# Altium PCB Alsoran PCB-20180114-version2.PcbDoc (part 1 of 4)
Units mil, origin at the board's own origin, x right, y up, seen from the top; angles counter-clockwise.
Board outline 15223.67 x 4104.31 mil, 2 copper layers (Top Layer, Bottom Layer); 293 components, 222 nets, 1561 pads, 240 vias.
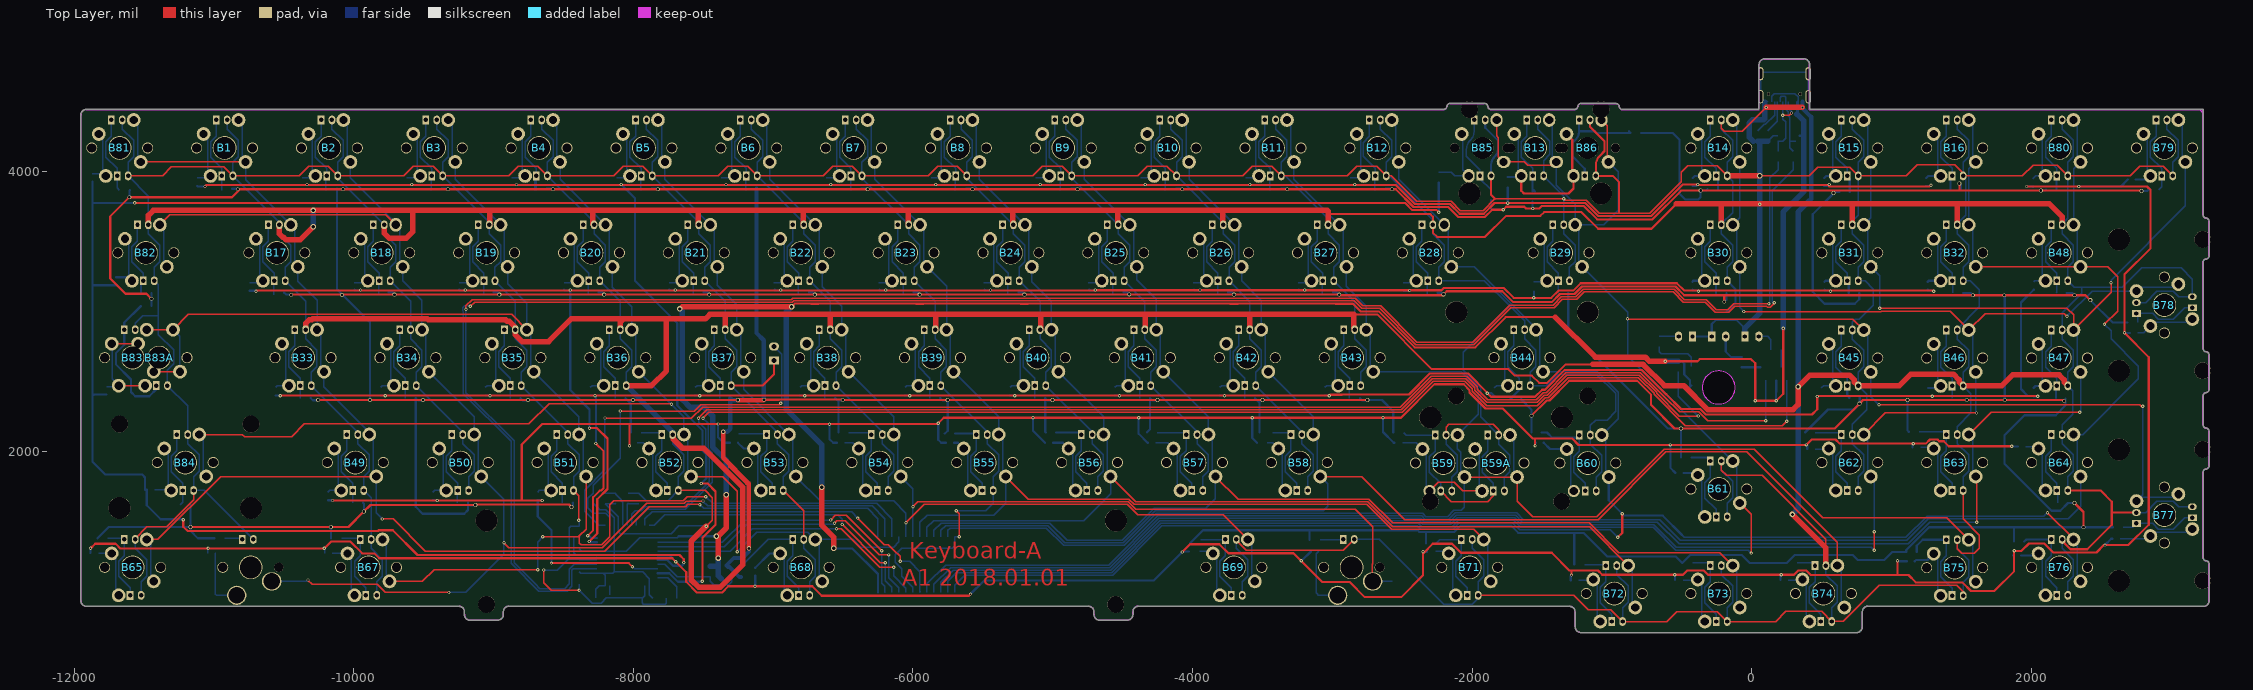
[diagram p0: Top Layer view]
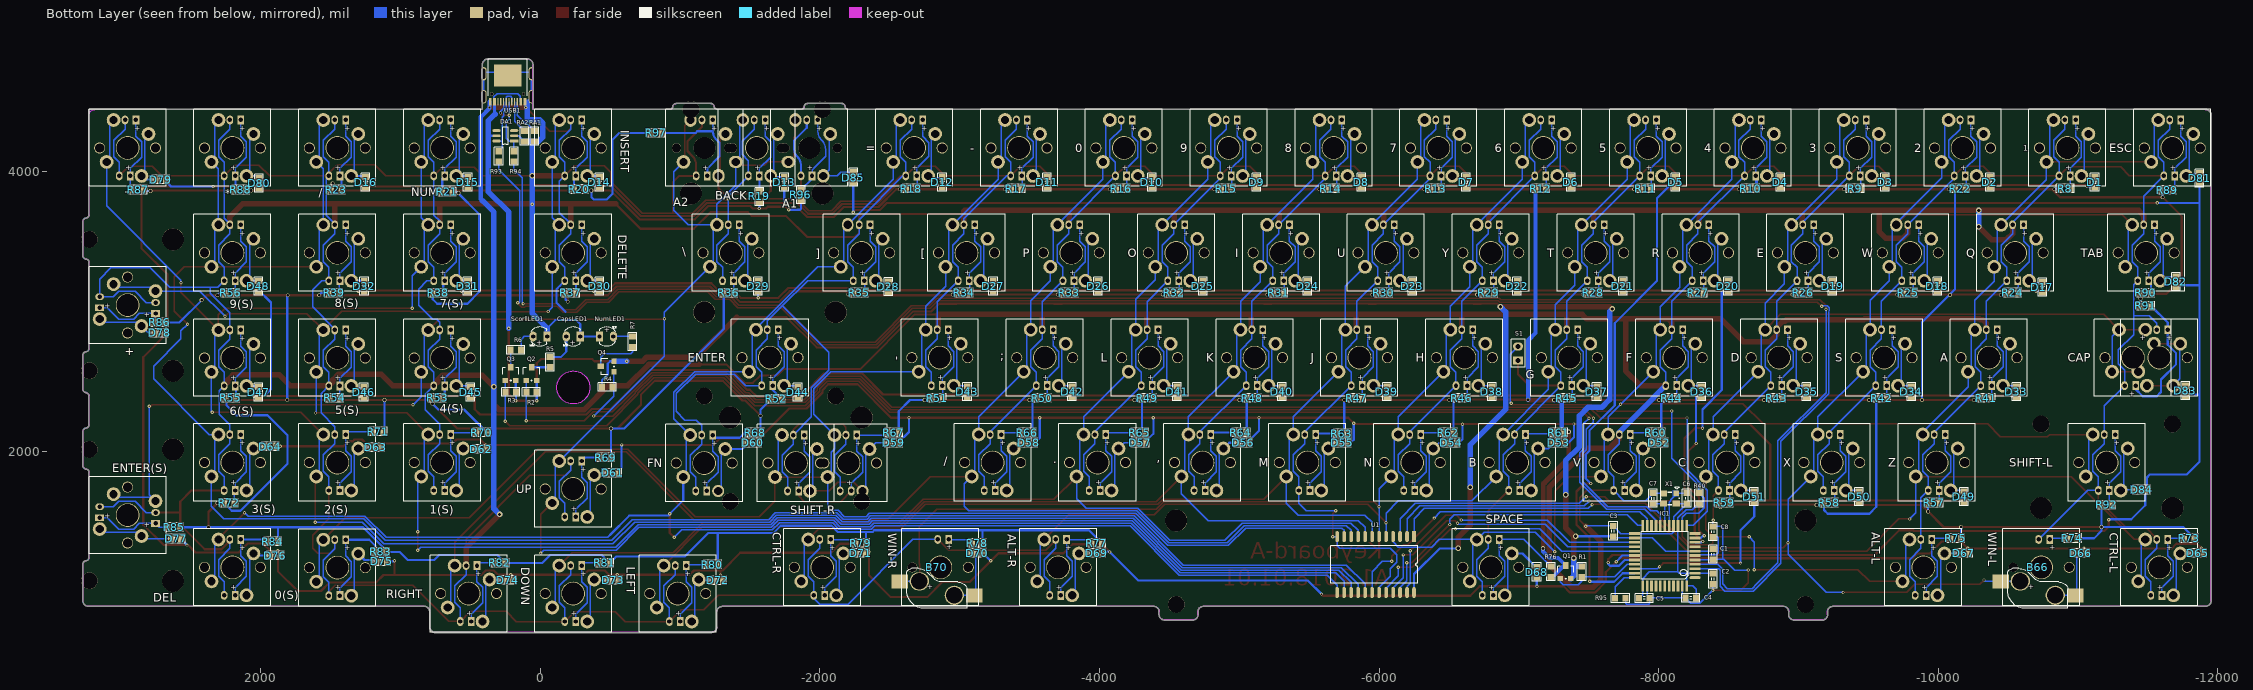
[diagram p1: Bottom Layer view, seen from below]

## Layer stack, top to bottom
Top Solder: solder mask 0.4, Solder Resist, Dk 3.5
Top Layer: signal copper 1.4
Dielectric1: dielectric 12.6, FR-4, Dk 4.8
Bottom Layer: signal copper 1.4
Bottom Solder: solder mask 0.4, Solder Resist, Dk 3.5

## Board outline
-9167.83,791.11 cw(c-9167.47,832.47) -9208.82,832.86 cw(c-9206.83,832.84) -9208.68,833.58 -9208.68,853.11 cw(c-9246.06,852.74) -9208.67,852.74 cw(c-9246.06,852.74) -9208.68,852.38 ccw(c-9206.69,852.36) -9208.68,852.36 -9208.68,853.11 ccw(c-9246.06,852.74) -9245.73,890.13 cw(c-9245.72,892.11) -9246.83,890.47 -11915.09,890.47 cw(c-11915.09,892.46) -11916.44,891 cw(c-11910.65,931.94) -11951.59,926.18 cw(c-11950.01,927.38) -11952,927.38 -11952,4407.27 cw(c-11950.01,4407.27) -11951.68,4408.35 -11951.67,4408.35 cw(c-11910.53,4404.25) -11914.52,4445.41 cw(c-11913.67,4443.62) -11913.67,4445.6 -2203.98,4445.6 cw(c-2203.98,4443.62) -2203.82,4445.59 cw(c-2203.58,4443.62) -2203.6,4445.61 ccw(c-2203.79,4467.29) -2182.1,4467.29 ccw(c-2203.79,4467.29) -2182.1,4467.5 cw(c-2180.12,4467.52) -2181.33,4469.09 cw(c-2156.45,4462.83) -2156.68,4488.48 cw(c-2156.66,4486.49) -2155.65,4488.2 -1914.05,4488.2 cw(c-1913.06,4486.49) -1913.04,4488.47 cw(c-1913.27,4462.82) -1888.39,4469.09 cw(c-1889.6,4467.51) -1887.62,4467.51 cw(c-1889.6,4467.51) -1887.62,4467.49 ccw(c-1865.93,4467.28) -1866.13,4445.6 -1266.74,4445.6 ccw(c-1266.94,4467.28) -1245.25,4467.28 ccw(c-1266.94,4467.28) -1245.26,4467.49 cw(c-1243.27,4467.51) -1244.48,4469.09 cw(c-1219.6,4462.82) -1219.83,4488.47 cw(c-1219.81,4486.49) -1218.82,4488.2 -972.59,4488.2 cw(c-972.59,4486.22) -970.81,4487.1 cw(c-972.8,4461.53) -947.92,4467.79 cw(c-949.13,4466.22) -947.15,4466.22 cw(c-949.13,4466.22) -947.15,4466.2 ccw(c-925.46,4465.99) -925.66,4444.31 51.17,4444.31 51.17,4768.7 cw(c53.15,4768.7) 51.66,4770.01 cw(c92.8,4765.84) 89,4807.02 cw(c89.57,4805.12) 89.57,4807.1 90.03,4807.1 cw(c92.8,4765.84) 93.2,4807.19 cw(c93.18,4805.21) 93.77,4807.1 372.05,4807.1 cw(c372.05,4805.12) 373.08,4806.81 cw(c372.14,4765.47) 413.49,4765.47 cw(c372.14,4765.47) 413.49,4765.07 cw(c411.51,4765.09) 413.4,4764.5 413.4,4445.6 3226.15,4445.6 cw(c3226.15,4443.62) 3228.13,4443.62 3228.13,3689.8 cw(c3226.15,3689.8) 3228.13,3689.65 ccw(c3249.81,3690.01) 3250.02,3668.32 cw(c3250.04,3666.34) 3251.61,3667.55 cw(c3245.35,3642.67) 3270.94,3644.42 cw(c3269.69,3642.88) 3271.67,3642.88 3271.67,3395.67 cw(c3269.69,3395.67) 3270.37,3393.81 cw(c3245.35,3399.49) 3251.62,3374.61 cw(c3250.05,3375.82) 3250.03,3373.84 ccw(c3249.82,3352.15) 3228.13,3352.35 3228.13,2734.25 cw(c3226.15,2734.25) 3228.13,2734.1 ccw(c3249.81,2734.46) 3250.02,2712.78 cw(c3250.04,2710.79) 3251.61,2712 cw(c3245.35,2687.12) 3270.94,2688.87 cw(c3269.69,2687.33) 3271.67,2687.33 3271.67,2440.12 cw(c3269.69,2440.12) 3270.37,2438.26 cw(c3245.35,2443.94) 3251.62,2419.07 cw(c3250.05,2420.28) 3250.03,2418.29 ccw(c3249.82,2396.61) 3228.13,2396.81 3228.13,2187.99 cw(c3226.15,2187.99) 3228.13,2187.84 ccw(c3249.81,2188.2) 3250.02,2166.52 cw(c3250.04,2164.53) 3251.61,2165.74 cw(c3245.35,2140.86) 3270.94,2142.61 cw(c3269.69,2141.07) 3271.67,2141.07 3271.67,1893.86 cw(c3269.69,1893.86) 3270.37,1892 cw(c3245.35,1897.68) 3251.62,1872.81 cw(c3250.05,1874.02) 3250.03,1872.03 ccw(c3249.82,1850.35) 3228.13,1850.55 3228.13,1238.77 ccw(c3249.81,1239.38) 3250.02,1217.7 cw(c3250.04,1215.71) 3251.61,1216.92 cw(c3245.35,1192.04) 3270.94,1193.79 cw(c3269.69,1192.25) 3271.67,1192.25 3271.67,931.1 cw(c3269.69,931.1) 3271.67,931.05 ccw(c3230.32,931.45) 3271.67,931.08 3271.67,931.05 cw(c3230.32,931.45) 3229.92,890.1 cw(c3229.94,892.08) 3228.78,890.47 827.49,890.47 cw(c827.49,892.46) 826.98,890.54 ccw(c828.32,853.18) 790.93,853.51 cw(c788.95,853.52) 790.65,852.51 790.65,742.41 cw(c788.67,742.41) 790.26,741.23 cw(c749.02,744.23) 748.62,702.88 cw(c748.64,704.86) 748.05,702.97 -1222.67,702.97 cw(c-1222.67,704.96) -1223.69,703.25 cw(c-1223.24,744.61) -1264.59,745 cw(c-1262.6,744.99) -1264.5,745.58 -1264.5,851.1 cw(c-1262.51,851.1) -1264.42,851.66 cw(c-1262.8,852.8) -1264.78,852.78 ccw(c-1302.16,852.45) -1302.52,889.84 cw(c-1302.54,891.82) -1302.56,889.84 cw(c-1303.15,891.73) -1303.15,889.75 -4389.76,889.75 cw(c-4389.76,891.73) -4391.22,890.39 ccw(c-4388.69,853.09) -4426.08,853.45 -4426.08,833.93 cw(c-4427.92,833.19) -4425.94,833.21 cw(c-4467.29,832.81) -4425.94,832.81 cw(c-4467.29,832.81) -4466.19,791.47 cw(c-4466.94,793.31) -4466.94,791.32 -4664.23,791.32 cw(c-4665.12,793.1) -4665.14,791.11 cw(c-4664.77,832.47) -4706.13,832.86 cw(c-4704.14,832.84) -4705.98,833.58 -4705.98,853.11 cw(c-4743.37,852.74) -4705.98,852.74 cw(c-4743.37,852.74) -4705.98,852.38 ccw(c-4704,852.36) -4705.98,852.36 -4705.98,853.11 ccw(c-4743.37,852.74) -4743.04,890.13 cw(c-4743.02,892.11) -4744.14,890.47 -8891.72,890.47 ccw(c-8891.39,853.09) -8928.77,853.45 ccw(c-8891.39,853.09) -8928.77,852.73 cw(c-8930.75,852.71) -8928.77,852.71 -8928.77,833.93 cw(c-8930.61,833.19) -8928.63,833.21 cw(c-8969.98,832.81) -8928.63,832.81 cw(c-8969.98,832.81) -8968.89,791.47 cw(c-8969.64,793.31) -8969.64,791.32 -9166.92,791.32 cw(c-9167.81,793.1)
cut-out: -355.03,2456.18 ccw(c-236.92,2456.18) -236.92,2338.07 ccw(c-236.92,2456.18) -118.81,2456.18 ccw(c-236.92,2456.18) -236.92,2574.29 ccw(c-236.92,2456.18)

## Design rules (kind name [scope] priority, off if disabled: settings)
Clearance Clearance_3 [OnLayer('Keep-Out Layer')] p1: gap=0.39
Clearance Clearance_2 [All vs (InNet('LROW'))  && INPOLY] p2: gap=13.78
Clearance Clearance_1 [All vs OnLayer('Keep-Out Layer')] p3: gap=3.94
Clearance [All] p4: gap=6
PolygonConnect PolygonConnect_1 [All vs ISVIA] p1: connectstyle=Direct reliefconductorwidth=10 reliefentries=4 polygonreliefangle="90 Angle" airgapwidth=10
PolygonConnect [All] p2: connectstyle=Direct reliefconductorwidth=10 reliefentries=4 polygonreliefangle="90 Angle" airgapwidth=10
RoutingVias [All] p1: holewidth=23.62 width=39.37 viastyle="Through Hole" minholewidth=11.81 minwidth=23.62 maxholewidth=28 maxwidth=50
SilkToSolderMaskClearance SilkscreenOverComponentPads [IsPad] p1: minsilkscreentomaskgap=10 clearancetoexposedcopper=TRUE
SolderMaskExpansion [All] p1: expansion=4
Width [All] p1: maxlimit=39.37 minlimit=10 preferedwidth=15.75
29 further rules are at their usual default settings.

## Components (designator, comment, footprint, x,y, rotation, side; value= is the part's Value field where it differs from the comment)
B1 "1" BUT#1 -10923.39,4169.29 r180 top locked
B2 "2" BUT#1 -10173.56,4169.29 r180 top locked
B3 "3" BUT#1 -9423.72,4169.29 r180 top locked
B4 "4" BUT#1 -8673.89,4169.29 r180 top locked
B5 "5" BUT#1 -7924.05,4169.29 r180 top locked
B6 "6" BUT#1 -7174.21,4169.29 r180 top locked
B7 "7" BUT#1 -6424.38,4169.29 r180 top locked
B8 "8" BUT#1 -5674.54,4169.29 r180 top locked
B9 "9" BUT#1 -4924.71,4169.29 r180 top locked
B10 "0" BUT#1 -4174.87,4169.29 r180 top locked
B11 "-" BUT#1 -3425.03,4169.29 r180 top locked
B12 "=" BUT#1 -2675.2,4169.29 r180 top
B13 "BACK" BUT#2 -1549.21,4169.29 r180 top locked
B14 "INSERT" BUT#1 -236.22,4169.29 r180 top locked
B15 "NUM" BUT#1 700.79,4169.29 r180 top locked
B16 "/" BUT#1 1450.79,4169.29 r180 top locked
B17 "Q" BUT#1 -10549.21,3419.29 r180 top locked
B18 "W" BUT#3 -9799.23,3419.29 r180 top locked
B19 "E" BUT#1 -9049.25,3419.29 r180 top locked
B20 "R" BUT#1 -8299.26,3419.29 r180 top locked
B21 "T" BUT#1 -7549.28,3419.29 r180 top locked
B22 "Y" BUT#1 -6799.29,3419.29 r180 top locked
B23 "U" BUT#1 -6049.31,3419.29 r180 top locked
B24 "I" BUT#1 -5299.33,3419.29 r180 top locked
B25 "O" BUT#1 -4549.34,3419.29 r180 top locked
B26 "P" BUT#1 -3799.36,3419.29 r180 top locked
B27 "[" BUT#1 -3049.38,3419.29 r180 top locked
B28 "]" BUT#4 -2299.39,3419.29 r180 top locked
B29 "\" BUT#1 -1364.17,3419.29 r180 top locked
B30 "DELETE" BUT#1 -236.22,3419.29 r180 top locked
B31 "7(S)" BUT#1 700.79,3419.29 r180 top locked
B32 "8(S)" BUT#1 1450.79,3419.29 r180 top locked
B33 "A" BUT#1 -10362.2,2669.29 r180 top locked
B34 "S" BUT#1 -9611.81,2669.29 r180 top locked
B35 "D" BUT#1 -8861.42,2669.29 r180 top locked
B36 "F" BUT#1 -8111.02,2669.29 r180 top locked
B37 "G" BUT#1 -7360.63,2669.29 r180 top locked
B38 "H" BUT#1 -6610.24,2669.29 r180 top locked
B39 "J" BUT#1 -5859.84,2669.29 r180 top locked
B40 "K" BUT#1 -5109.45,2669.29 r180 top locked
B41 "L" BUT#1 -4359.06,2669.29 r180 top locked
B42 ";" BUT#1 -3608.66,2669.29 r180 top locked
B43 "'" BUT#1 -2858.27,2669.29 r180 top locked
B44 "ENTER" BUT#1 -1643.7,2669.29 r180 top locked
B45 "4(S)" BUT#1 700.79,2667.32 r180 top locked
B46 "5(S)" BUT#1 1450.79,2667.32 r180 top locked
B47 "6(S)" BUT#1 2200.79,2667.32 r180 top locked
B48 "9(S)" BUT#1 2200.79,3419.29 r180 top locked
B49 "Z" BUT#1 -9988.19,1919.29 r180 top locked
B50 "X" BUT#1 -9237.97,1919.29 r180 top locked
B51 "C" BUT#1 -8487.75,1919.29 r180 top locked
B52 "V" BUT#1 -7737.53,1919.29 r180 top locked
B53 "B" BUT#1 -6987.31,1919.29 r180 top locked
B54 "N" BUT#1 -6237.1,1919.29 r180 top locked
B55 "M" BUT#1 -5486.88,1919.29 r180 top locked
B56 "," BUT#1 -4736.66,1919.29 r180 top locked
B57 "." BUT#1 -3986.44,1919.29 r180 top locked
B58 "/" BUT#1 -3236.22,1919.29 r180 top locked
B59 "SHIFT-R" BUT#5 -2205.41,1915.8 r180 top locked
B59A "SHIFT-R" BUT#1 -1829.32,1915.8 r180 top locked
B60 "FN" BUT#6 -1173.23,1915.8 r180 top locked
B61 "UP" BUT#1 -236.22,1730.31 r180 top locked
B62 "1(S)" BUT#1 700.79,1919.29 r180 top locked
B63 "2(S)" BUT#1 1450.79,1919.29 r180 top locked
B64 "3(S)" BUT#1 2200.79,1919.29 r180 top locked
B65 "CTRL-L" BUT#1 -11580.71,1169.29 r180 top locked
B66 "WIN-L" BUT1#1 -10736.22,1169.29 r0 top
B67 "ALT-L" BUT#1 -9893.7,1169.29 r180 top locked
B68 "SPACE" BUT#1 -6799.21,1169.29 r180 top
B69 "ALT-R" BUT#1 -3704.72,1169.29 r180 top locked
B70 "WIN-R" BUT1#2 -2862.2,1169.29 r0 top locked
B71 "CTRL-R" BUT#1 -2017.72,1169.29 r180 top locked
B72 "LEFT" BUT#1 -984.25,982.28 r180 top locked
B73 "DOWN" BUT#1 -236.22,982.28 r180 top locked
B74 "RIGHT" BUT#1 511.81,982.28 r180 top locked
B75 "0(S)" BUT#1 1450.79,1167.32 r180 top locked
B76 "DEL" BUT#1 2200.79,1169.29 r180 top locked
B77 "ENTER(S)" BUT#1 2950.79,1543.31 r270 top locked
B78 "+" BUT#1 2950.79,3045.28 r270 top locked
B79 "-" BUT#1 2950.79,4169.29 r180 top locked
B80 "*" BUT#1 2200.79,4169.29 r180 top locked
B81 "ESC" BUT#1 -11673.23,4169.29 r180 top locked
B82 "TAB" BUT#1 -11486.22,3419.29 r180 top locked
B83 "CAP" BUT#7 -11580.71,2669.29 r180 top locked
B83A "CAP" BUT#8 -11391.73,2669.29 r180 top locked
B84 "SHIFT-L" BUT#1 -11204.72,1919.29 r180 top locked
B85 "A1" BUT#9 -1925.36,4169.29 r180 top (schematic designator B13)
B86 "A2" BUT#10 -1175.53,4169.29 r180 top (schematic designator B13)
C1 "100nF(104) 10% 50V" c0805 -8387.8,1264.17 r90 bottom
C2 "100nF(104) 10% 50V" c0805 -8387.8,1086.61 r90 bottom
C3 "100nF(104) 10% 50V" c0805 -7675.2,1429.13 r270 bottom
C4 "100nF(104) 10% 50V" c0805 -8230.31,950.79 r180 bottom
C5 "1uF (105) 10% 50V" c0805 -7897.64,948.82 r0 bottom
C6 "22pF (220) 5% 50V" C0805 -8200.79,1663.41 r90 bottom
C7 "22pF (220) 5% 50V" C0805 -7960.63,1662.63 r270 bottom
C8 "1uF (105) 10% 50V" C0805 -8387.8,1425.2 r270 bottom
CapsLED1 "LED" LED -186.92,2820.87 r180 bottom
D1 "Snip-二极管" D0805 -11118.77,3954.72 r0 bottom
D2 "Snip-二极管" D0805 -10369.42,3954.72 r0 bottom
D3 "Snip-二极管" D0805 -9620.08,3954.72 r0 bottom
D4 "Snip-二极管" D0805 -8870.74,3954.72 r0 bottom
D5 "Snip-二极管" D0805 -8121.39,3954.72 r0 bottom
D6 "Snip-二极管" D0805 -7372.05,3954.72 r0 bottom
D7 "Snip-二极管" D0805 -6622.7,3954.72 r0 bottom
D8 "Snip-二极管" D0805 -5873.36,3954.72 r0 bottom
D9 "Snip-二极管" D0805 -5124.02,3954.72 r0 bottom
D10 "Snip-二极管" D0805 -4374.67,3954.72 r0 bottom
D11 "Snip-二极管" D0805 -3625.33,3954.72 r0 bottom
D12 "Snip-二极管" D0805 -2875.98,3954.72 r0 bottom
D13 "Snip-二极管" D0805 -1746.06,3954.72 r0 bottom
D14 "Snip-二极管" D0805 -423.23,3954.72 r0 bottom
D15 "Snip-二极管" D0805 517.72,3954.72 r0 bottom
D16 "Snip-二极管" D0805 1248.03,3954.72 r0 bottom
D17 "Snip-二极管" D0805 -10744.59,3204.72 r0 bottom
D18 "Snip-二极管" D0805 -9993.86,3212.22 r0 bottom
D19 "Snip-二极管" D0805 -9244.37,3212.22 r0 bottom
D20 "Snip-二极管" D0805 -8494.88,3212.22 r0 bottom
D21 "Snip-二极管" D0805 -7743.42,3212.22 r0 bottom
D22 "Snip-二极管" D0805 -6988.03,3212.22 r0 bottom
D23 "Snip-二极管" D0805 -6238.54,3212.22 r0 bottom
D24 "Snip-二极管" D0805 -5489.05,3212.22 r0 bottom
D25 "Snip-二极管" D0805 -4739.56,3212.22 r0 bottom
D26 "Snip-二极管" D0805 -3990.08,3212.22 r0 bottom
D27 "Snip-二极管" D0805 -3240.59,3212.22 r0 bottom
D28 "Snip-二极管" D0805 -2491.1,3208.28 r0 bottom
D29 "Snip-二极管" D0805 -1558.98,3212.22 r0 bottom
D30 "Snip-二极管" D0805 -425.47,3212.22 r0 bottom
D31 "Snip-二极管" D0805 519.69,3212.22 r0 bottom
D32 "Snip-二极管" D0805 1257.87,3212.22 r0 bottom
D33 "Snip-二极管" D0805 -10558.31,2456.69 r0 bottom
D34 "Snip-二极管" D0805 -9807.91,2456.69 r0 bottom
D35 "Snip-二极管" D0805 -9057.52,2456.69 r0 bottom
D36 "Snip-二极管" D0805 -8307.13,2456.69 r0 bottom
D37 "Snip-二极管" D0805 -7556.73,2456.69 r0 bottom
D38 "Snip-二极管" D0805 -6806.34,2456.69 r0 bottom
D39 "Snip-二极管" D0805 -6055.95,2456.69 r0 bottom
D40 "Snip-二极管" D0805 -5305.55,2456.69 r0 bottom
D41 "Snip-二极管" D0805 -4555.16,2456.69 r0 bottom
D42 "Snip-二极管" D0805 -3804.77,2456.69 r0 bottom
D43 "Snip-二极管" D0805 -3054.37,2456.69 r0 bottom
D44 "Snip-二极管" D0805 -1842.52,2452.76 r0 bottom
D45 "Snip-二极管" D0805 498.03,2452.76 r0 bottom
D46 "Snip-二极管" D0805 1261.81,2452.76 r0 bottom
D47 "Snip-二极管" D0805 2013.78,2452.76 r0 bottom
D48 "Snip-二极管" D0805 2015.75,3212.22 r0 bottom
D49 "Snip-二极管" D0805 -10183.31,1706.69 r0 bottom
D50 "Snip-二极管" D0805 -9433.11,1706.69 r0 bottom
D51 "Snip-二极管" D0805 -8682.91,1706.69 r0 bottom
D52 "Snip-二极管" D0805 -7972.44,2061.02 r270 bottom
D53 "Snip-二极管" D0805 -7251.97,2061.02 r270 bottom
D54 "Snip-二极管" D0805 -6486.22,2061.02 r270 bottom
D55 "Snip-二极管" D0805 -5706.69,2061.02 r270 bottom
D56 "Snip-二极管" D0805 -4998.03,2061.02 r270 bottom
D57 "Snip-二极管" D0805 -4262.03,2061.02 r270 bottom
D58 "Snip-二极管" D0805 -3464.57,2061.02 r270 bottom
D59 "Snip-二极管" D0805 -2498.03,2061.02 r270 bottom
D60 "Snip-二极管" D0805 -1488.19,2061.02 r270 bottom
D61 "Snip-二极管" D0805 -488.19,1844.49 r270 bottom
D62 "Snip-二极管" D0805 452.76,2015.75 r270 bottom
D63 "Snip-二极管" D0805 1206.69,2027.56 r270 bottom
D64 "Snip-二极管" D0805 1960.63,2033.46 r270 bottom
D65 "Snip-二极管" D0805 -11824.8,1271.65 r270 bottom
D66 "Snip-二极管" D0805 -10988.19,1271.65 r270 bottom
D67 "Snip-二极管" D0805 -10151.57,1271.65 r270 bottom
D68 "Snip-二极管" D0805 -7127.95,1167.3 r0 bottom
D69 "Snip-二极管" D0805 -3948.82,1271.65 r270 bottom
D70 "Snip-二极管" D0805 -3096.46,1271.65 r270 bottom
D71 "Snip-二极管" D0805 -2259.84,1271.65 r270 bottom
D72 "Snip-二极管" D0805 -1238.19,1076.77 r270 bottom
D73 "Snip-二极管" D0805 -492.13,1078.74 r270 bottom
D74 "Snip-二极管" D0805 261.81,1078.74 r270 bottom
D75 "Snip-二极管" D0805 1165.35,1212.6 r270 bottom
D76 "Snip-二极管" D0805 1925.2,1253.94 r270 bottom
D77 "Snip-二极管" D0805 2635.83,1374.02 r270 bottom
D78 "Snip-二极管" D0805 2753.94,2846.46 r270 bottom
D79 "Snip-二极管" D0805 2746.06,3942.91 r270 bottom
D80 "Snip-二极管" D0805 2009.84,3948.82 r0 bottom
D81 "Snip-二极管" D0805 -11868.11,3984.25 r0 bottom
D82 "Snip-二极管" D0805 -11698.82,3244.09 r0 bottom
D83 "Snip-二极管" D0805 -11767.72,2462.6 r0 bottom
D84 "Snip-二极管" D0805 -11423.23,1724.41 r270 bottom
D85 "Snip-二极管" D0805 -2240,3989.37 r0 bottom (schematic designator D12)
DA1 "TVS SRV05" SOT-23-6 186.02,4218.5 r0 bottom
IC1 "AtmEGA 32U4" LQFP44 -8259.84,1096.46 r0 bottom locked
NumLED1 "LED" LED -524.13,2820.87 r0 bottom
Q1 "CJ2305" sot-23 -7276.08,1068.61 r180 bottom
Q2 "CJ2305" sot-23 120.6,2486.6 r180 bottom
Q3 "CJ2305" sot-23 270,2486.6 r180 bottom
Q4 "CJ2305" sot-23 -547.24,2547.24 r90 bottom
R1 "10KΩ (1002) ±1%" 0805 -7449.95,1139.15 r90 bottom
R2 "10KΩ (1002) ±1%" 0805 61.81,2424.3 r180 bottom
R3 "10KΩ (1002) ±1%" 0805 211.2,2424.3 r180 bottom
R4 "10KΩ (1002) ±1%" 0805 -480.31,2460.63 r0 bottom
R5 "R for LED" 0805 -71.5,2638.08 r90 bottom
R6 "R for LED" 0805 173.6,2724.8 r180 bottom
R7 "R for LED" 0805 -661.1,2783.46 r90 bottom
R8 "Snip-灯阻" 0805 -10907.48,3877.95 r180 bottom
R9 "Snip-灯阻" 0805 -9407.12,3877.95 r180 bottom
R10 "Snip-灯阻" 0805 -8656.94,3877.95 r180 bottom
R11 "Snip-灯阻" 0805 -7906.76,3877.95 r180 bottom
R12 "Snip-灯阻" 0805 -7156.59,3877.95 r180 bottom
R13 "Snip-灯阻" 0805 -6406.41,3877.95 r180 bottom
R14 "Snip-灯阻" 0805 -5656.23,3877.95 r180 bottom
R15 "Snip-灯阻" 0805 -4906.05,3877.95 r180 bottom
R16 "Snip-灯阻" 0805 -4155.87,3877.95 r180 bottom
R17 "Snip-灯阻" 0805 -3405.69,3877.95 r180 bottom
R18 "Snip-灯阻" 0805 -2655.51,3877.95 r180 bottom
R19 "Snip-灯阻" 0805 -1568.15,3822 r90 bottom
R20 "Snip-灯阻" 0805 -279.53,3874.02 r0 bottom
R21 "Snip-灯阻" 0805 663.39,3854.33 r0 bottom
R22 "Snip-灯阻" 0805 -10157.3,3877.95 r180 bottom
R23 "Snip-灯阻" 0805 1458.66,3870.08 r180 bottom
R24 "Snip-灯阻" 0805 -10533.46,3133.86 r180 bottom
R25 "Snip-灯阻" 0805 -9783.46,3133.86 r180 bottom
R26 "Snip-灯阻" 0805 -9033.46,3133.86 r180 bottom
R27 "Snip-灯阻" 0805 -8283.46,3133.86 r180 bottom
R28 "Snip-灯阻" 0805 -7533.47,3133.86 r180 bottom
R29 "Snip-灯阻" 0805 -6783.47,3133.86 r180 bottom
R30 "Snip-灯阻" 0805 -6033.47,3133.86 r180 bottom
R31 "Snip-灯阻" 0805 -5283.47,3133.86 r180 bottom
R32 "Snip-灯阻" 0805 -4533.47,3133.86 r180 bottom
R33 "Snip-灯阻" 0805 -3783.47,3133.86 r180 bottom
R34 "Snip-灯阻" 0805 -3033.47,3133.86 r180 bottom
R35 "Snip-灯阻" 0805 -2283.47,3133.86 r180 bottom
R36 "Snip-灯阻" 0805 -1350.39,3131.89 r180 bottom
R37 "Snip-灯阻" 0805 -218.5,3131.89 r180 bottom
R38 "Snip-灯阻" 0805 730.31,3131.89 r180 bottom
R39 "Snip-灯阻" 0805 1474.41,3131.89 r180 bottom
R40 "10KΩ (1002) ±1%" 0805 -8287.4,1662.63 r270 bottom
R41 "Snip-灯阻" 0805 -10344.49,2379.92 r180 bottom
R42 "Snip-灯阻" 0805 -9594.09,2379.92 r180 bottom
R43 "Snip-灯阻" 0805 -8843.7,2379.92 r180 bottom
R44 "Snip-灯阻" 0805 -8093.31,2379.92 r180 bottom
R45 "Snip-灯阻" 0805 -7342.91,2379.92 r180 bottom
R46 "Snip-灯阻" 0805 -6592.52,2379.92 r180 bottom
R47 "Snip-灯阻" 0805 -5842.13,2379.92 r180 bottom
R48 "Snip-灯阻" 0805 -5091.73,2379.92 r180 bottom
R49 "Snip-灯阻" 0805 -4341.34,2379.92 r180 bottom
R50 "Snip-灯阻" 0805 -3590.94,2379.92 r180 bottom
R51 "Snip-灯阻" 0805 -2840.55,2379.92 r180 bottom
R52 "Snip-灯阻" 0805 -1688.98,2374.02 r180 bottom
R53 "Snip-灯阻" 0805 734.25,2381.89 r180 bottom
R54 "Snip-灯阻" 0805 1468.5,2381.89 r180 bottom
R55 "Snip-灯阻" 0805 2212.6,2381.89 r180 bottom
R56 "Snip-灯阻" 0805 2214.57,3131.89 r180 bottom
R57 "Snip-灯阻" 0805 -9970.47,1631.89 r180 bottom
R58 "Snip-灯阻" 0805 -9220.08,1631.89 r180 bottom
R59 "Snip-灯阻" 0805 -8469.69,1631.89 r180 bottom
R60 "Snip-灯阻" 0805 -7980.31,2133.86 r0 bottom
R61 "Snip-灯阻" 0805 -7283.46,2133.86 r0 bottom
R62 "Snip-灯阻" 0805 -6496.06,2133.86 r0 bottom
R63 "Snip-灯阻" 0805 -5734.84,2125.98 r0 bottom
R64 "Snip-灯阻" 0805 -5012.25,2133.86 r0 bottom
R65 "Snip-灯阻" 0805 -4289.37,2133.86 r0 bottom
R66 "Snip-灯阻" 0805 -3484.25,2133.86 r0 bottom
R67 "Snip-灯阻" 0805 -2527.56,2133.86 r0 bottom
R68 "Snip-灯阻" 0805 -1539.37,2133.86 r0 bottom
R69 "Snip-灯阻" 0805 -468.5,1954.72 r0 bottom
R70 "Snip-灯阻" 0805 417.32,2133.86 r0 bottom
R71 "Snip-灯阻" 0805 1159.45,2139.76 r0 bottom
R72 "Snip-灯阻" 0805 2224.41,1629.92 r180 bottom
R73 "Snip-灯阻" 0805 -11795.28,1377.95 r0 bottom
R74 "Snip-灯阻" 0805 -10959.65,1377.95 r0 bottom
R75 "Snip-灯阻" 0805 -10124.02,1377.95 r0 bottom
R76 "Snip-灯阻" 0805 -7228.59,1139.15 r90 bottom
R77 "Snip-灯阻" 0805 -3980.31,1342.52 r0 bottom
R78 "Snip-灯阻" 0805 -3125.98,1342.52 r0 bottom
R79 "Snip-灯阻" 0805 -2293.31,1342.52 r0 bottom
R80 "Snip-灯阻" 0805 -1232.28,1188.98 r0 bottom
R81 "Snip-灯阻" 0805 -460.63,1200.79 r0 bottom
R82 "Snip-灯阻" 0805 287.4,1200.79 r0 bottom
R83 "Snip-灯阻" 0805 1141.73,1279.53 r0 bottom
R84 "Snip-灯阻" 0805 1911.42,1354.33 r0 bottom
R85 "Snip-灯阻" 0805 2618.11,1456.69 r0 bottom
R86 "Snip-灯阻" 0805 2722.44,2921.26 r0 bottom
R87 "Snip-灯阻" 0805 2874.02,3870.08 r0 bottom
R88 "Snip-灯阻" 0805 2141.73,3870.08 r0 bottom
R89 "Snip-灯阻" 0805 -11637.8,3868.11 r180 bottom
R90 "Snip-灯阻" 0805 -11484.25,3131.89 r180 bottom
R91 "Snip-灯阻" 0805 -11484.25,3039.37 r180 bottom
R92 "Snip-灯阻" 0805 -11204.72,1616.14 r180 bottom
R93 "22Ω (22R0) ±1%" 0805 296.26,4108.27 r270 bottom
R94 "22Ω (22R0) ±1%" 0805 187.99,4108.27 r270 bottom
R95 "10KΩ (1002) ±1%" 0805 -7726.38,948.82 r0 bottom
R96 "Snip-灯阻" 0805 -1865.36,3833.36 r90 bottom (schematic designator R18)
R97 "Snip-灯阻" 0805 -831,4277 r180 bottom (schematic designator R19)
RA1 "5.1K" 0805 41.34,4254.33 r90 bottom
RA2 "5.1K" 0805 113.19,4254.33 r90 bottom
S1 "Switch 2" HDR1X2 -6994.09,2649.61 r90 bottom
ScorllLED1 "LED" LED 50.28,2820.87 r180 bottom
U1 "74HC154" SOP24W -6250,1389.76 r270 bottom
USB1 "USB TYPEC" "USB TYPEC1" 346.46,4555.12 r0 bottom
X1 "XTAL" CRY_X3225 -8125.98,1698.45 r270 bottom

## Footprints (in the part's own frame and the unit in brackets; to place one, negate y for a bottom-side part, rotate by r counter-clockwise, add the part's x,y. Pads: shape width x height; smd on the part's side, far side on the other; paste and mask are expansions set on the pad)
0805 [mm]
  rect 1.1x1.25 smd: 1(-0.95,0) 2(0.95,0)
  silkscreen extent -1.65,-0.78 1.63,0.78
BUT#1 [mm]
  round 2 hole 1.699 mask+0.102: 0(-5.08,0) 0(5.08,0)
  round 4.3 hole 3.98 mask+0.102: 0(0,0)
  round 2.499 hole 1.501 mask+0.102: 1(-3.81,2.54) 1(-2.54,-5.08) 2(2.54,5.08) 2(3.81,-2.54)
  rect 1.2x1.6 hole 0.813 mask+0.102: 3(0.481,5.08) 3(1.524,-5.08)
  oval 1.2x1.6 hole 0.813 mask+0.102: 4(-1.524,5.08) 4(-0.466,-5.08)
BUT#2 [mm]
  round 1.699 hole 1.699 mask+0.102: 0(-5.08,0) 0(5.08,0)
  round 4.3 hole 3.98 mask+0.102: 0(0,0)
  oval 2.499x2.235 hole 1.501 mask+0.102: 1(-3.81,2.54)
  oval 2.2x2.499 hole 1.501 mask+0.102: 1(-2.54,-5.08) 2(2.54,5.08)
  round 2.499 hole 1.501 mask+0.102: 2(3.81,-2.54)
  rect 1.2x1.6 hole 0.813 mask+0.102: 3(0.481,5.08) 3(1.524,-5.08)
  oval 1.2x1.6 hole 0.813 mask+0.102: 4(-1.524,5.08) 4(-0.466,-5.08)
BUT#3 [mm]
  round 2 hole 1.699 mask+0.102: 0(-5.08,0) 0(5.08,0)
  round 4.3 hole 3.98 mask+0.102: 0(0,0)
  round 2.499 hole 1.501 mask+0.102: 1(-3.81,2.54) 2(2.54,5.08) 2(3.81,-2.54)
  oval 2.2x2.5 hole 1.501 mask+0.102: 1(-2.54,-5.08)
  rect 1.2x1.6 hole 0.813 mask+0.102: 3(0.481,5.08) 3(1.524,-5.08)
  oval 1.2x1.6 hole 0.813 mask+0.102: 4(-1.524,5.08) 4(-0.466,-5.08)
BUT#4 [mm]
  round 2 hole 1.699 mask+0.102: 0(-5.08,0) 0(5.08,0)
  round 4.3 hole 3.98 mask+0.102: 0(0,0)
  round 2.499 hole 1.501 mask+0.102: 1(-3.81,2.54) 2(2.54,5.08) 2(3.81,-2.54)
  oval 2.032x2.499 hole 1.501 mask+0.102: 1(-2.54,-5.08)
  rect 1.2x1.6 hole 0.813 mask+0.102: 3(0.481,5.08) 3(1.524,-5.08)
  oval 1.2x1.6 hole 0.813 mask+0.102: 4(-1.524,5.08) 4(-0.466,-5.08)
BUT#5 [mm]
  round 2 hole 1.699 mask+0.102: 0(-5.08,0) 0(5.08,0)
  round 4.3 hole 3.98 mask+0.102: 0(0,0)
  round 2.499 hole 1.501 mask+0.102: 1(-3.81,2.54) 1(-2.54,-5.08) 2(3.81,-2.54)
  round 2.2 hole 1.501 mask+0.102: 2(2.54,5.08)
  oct 1.2x1.6 hole 0.813 mask+0.102: 3(0.481,5.08)
  rect 1.2x1.6 hole 0.813 mask+0.102: 3(1.524,-5.08)
  oval 1.2x1.6 hole 0.813 mask+0.102: 4(-1.524,5.08) 4(-0.466,-5.08)
BUT#6 [mm]
  round 2 hole 1.699 mask+0.102: 0(-5.08,0) 0(5.08,0)
  round 4.3 hole 3.98 mask+0.102: 0(0,0)
  round 2.499 hole 1.501 mask+0.102: 1(-3.81,2.54) 1(-2.54,-5.08) 2(3.81,-2.54)
  round 2.2 hole 1.501 mask+0.102: 2(2.54,5.08)
  rect 1.2x1.6 hole 0.813 mask+0.102: 3(0.481,5.08) 3(1.524,-5.08)
  oval 1.2x1.6 hole 0.813 mask+0.102: 4(-1.524,5.08) 4(-0.466,-5.08)
BUT#7 [mm]
  round 2 hole 1.699 mask+0.102: 0(-5.08,0) 0(5.08,0)
  round 4.3 hole 3.98 mask+0.102: 0(0,0)
  round 2.499 hole 1.501 mask+0.102: 1(-3.81,2.54) 1(-2.54,-5.08) 2(2.54,5.08) 2(3.81,-2.54)
  rect 1.2x1.6 hole 0.813 mask+0.102: 3(1.524,-5.08)
  oval 1.2x1.6 hole 0.813 mask+0.102: 4(-0.466,-5.08)
BUT#8 [mm]
  round 2 hole 1.699 mask+0.102: 0(-5.08,0) 0(5.08,0)
  round 4.3 hole 3.98 mask+0.102: 0(0,0)
  round 2.499 hole 1.501 mask+0.102: 1(-3.81,2.54) 1(-2.54,-5.08) 2(2.54,5.08) 2(3.81,-2.54)
  rect 1.2x1.6 hole 0.813 mask+0.102: 3(0.481,5.08)
  oval 1.2x1.6 hole 0.813 mask+0.102: 4(-1.524,5.08)
BUT#9 [mm]
  round 1.699 hole 1.699 mask+0.102: 0(-5.08,0) 0(5.08,0)
  round 3.98 hole 3.98 mask+0.102: 0(0,0)
  oval 2.499x2.2 hole 1.501 mask+0.102: 1(-3.81,2.54)
  oval 2.2x2.499 hole 1.501 mask+0.102: 1(-2.54,-5.08) 2(2.54,5.08)
  round 2.499 hole 1.501 mask+0.102: 2(3.81,-2.54)
  rect 1.2x1.6 hole 0.813 mask+0.102: 3(0.481,5.08) 3(1.524,-5.08)
  oval 1.2x1.6 hole 0.813 mask+0.102: 4(-1.524,5.08) 4(-0.466,-5.08)
BUT#10 [mm]
  round 1.699 hole 1.699 mask+0.102: 0(-5.08,0)
  round 3.98 hole 3.98 mask+0.102: 0(0,0)
  round 1.7 hole 1.699 mask+0.102: 0(5.08,0)
  round 2.499 hole 1.501 mask+0.102: 1(-3.81,2.54) 2(3.81,-2.54)
  oval 2.2x2.499 hole 1.501 mask+0.102: 1(-2.54,-5.08) 2(2.54,5.08)
  rect 1.2x1.6 hole 0.813 mask+0.102: 3(0.481,5.08) 3(1.524,-5.08)
  oval 1.2x1.6 hole 0.813 mask+0.102: 4(-1.524,5.08) 4(-0.466,-5.08)
BUT1#1 [mm]
  round 2 hole 1.699 mask+0.102: 0(-5.08,0)
  round 4.3 hole 3.98 mask+0.102: 0(0,0)
  round 1.699 hole 1.699 unplated mask+0.102: 0(5.08,0)
  oval 3.556x3.302 hole 3 mask+0.102: 1(3.81,-2.54)
  rect 3x2.5 smd far side: 1(7.4,-2.55) 2(-6.15,-5.1)
  round 3.5 hole 3 mask+0.102: 2(-2.54,-5.08)
  rect 1.2x1.6 hole 0.813 mask+0.102: 3(-1.524,5.08)
  oval 1.2x1.6 hole 0.813 mask+0.102: 4(0.481,5.08)
BUT1#2 [mm]
  round 2 hole 1.699 mask+0.102: 0(-5.08,0)
  round 4.3 hole 3.98 unplated mask+0.102: 0(0,0)
  round 1.8 hole 1.699 mask+0.102: 0(5.08,0)
  oval 3.556x3.302 hole 3 mask+0.102: 1(3.81,-2.54)
  rect 3x2.5 smd far side: 1(7.4,-2.55) 2(-6.15,-5.1)
  round 3.5 hole 3 mask+0.102: 2(-2.54,-5.08)
  rect 1.2x1.6 hole 0.813 mask+0.102: 3(-1.524,5.08)
  oval 1.2x1.6 hole 0.813 mask+0.102: 4(0.481,5.08)
c0805 [mm]
  rect 1.1x1.25 smd: 1(-0.95,0) 2(0.95,0)
  silkscreen extent -1.65,-0.78 1.63,0.78
C0805 [mm]
  rect 1.1x1.25 smd: 1(-0.95,0) 2(0.95,0)
  silkscreen extent -1.65,-0.78 1.63,0.78
CRY_X3225 [mm]
  rect 1x1 smd: 1(0,0)
  rect 1.1x1.3 smd: 2(0,-2.3) 3(1.8,-2.3) 4(1.8,0)
  silkscreen extent -0.25,-2.79 2.03,0.51
D0805 [mm]
  rect 1.25x1.1 smd: 1(0,-0.15) 2(0,1.75)
  silkscreen extent -0.78,-0.85 0.78,2.43
HDR1X2 [mm] "Connector; Header; 2 Position"
  rect 1.5x1.8 hole 0.9: 1(0,0)
  oval 1.5x1.8 hole 0.9: 2(2.54,0)
  silkscreen extent -1.27,-1.27 3.81,1.27
LED [mm]
  oval 1.3x1.8 hole 0.8: 1(0,0)
  rect 1.3x1.8 hole 0.8: 2(2.54,0)
  silkscreen extent -0.5,-1.81 2.5,1.81
LQFP44 [mm]
  oval 2x0.5 smd: 1(0,0)
  rect 2x0.5 smd: 2(0,-0.8) 3(0,-1.6) 4(0,-2.4) 5(0,-3.2) 6(0,-4) 7(0,-4.8) 8(0,-5.6) 9(0,-6.4) 10(0,-7.2) 11(0,-8) 23(11,-8) 24(11,-7.2) 25(11,-6.4) 26(11,-5.6) 27(11,-4.8) 28(11,-4) 29(11,-3.2) 30(11,-2.4) 31(11,-1.6) 32(11,-0.8) 33(11,0)
  rect 0.5x2 smd: 12(1.5,-9.5) 13(2.3,-9.5) 14(3.1,-9.5) 15(3.9,-9.5) 16(4.7,-9.5) 17(5.5,-9.5) 18(6.3,-9.5) 19(7.1,-9.5) 20(7.9,-9.5) 21(8.7,-9.5) 22(9.5,-9.5) 34(9.5,1.5) 35(8.7,1.5) 36(7.9,1.5) 37(7.1,1.5) 38(6.3,1.5) 39(5.5,1.5) 40(4.7,1.5) 41(3.9,1.5) 42(3.1,1.5) 43(2.3,1.5) 44(1.5,1.5)
  silkscreen extent 1.2,-8.3 9.8,0.3
SOP24W [mm]
  rect 2x0.65 smd: 1(0,0)
  oval 2x0.65 smd: 2(0,-1.27) 3(0,-2.54) 4(0,-3.81) 5(0,-5.08) 6(0,-6.35) 7(0,-7.62) 8(0,-8.89) 9(0,-10.16) 10(0,-11.43) 11(0,-12.7) 12(0,-13.97) 13(10.16,-13.97) 14(10.16,-12.7) 15(10.16,-11.43) 16(10.16,-10.16) 17(10.16,-8.89) 18(10.16,-7.62) 19(10.16,-6.35) 20(10.16,-5.08) 21(10.16,-3.81) 22(10.16,-2.54) 23(10.16,-1.27) 24(10.16,0)
  silkscreen extent 1.63,-15.15 8.53,0.63
sot-23 [mm]
  rect 1x0.9 smd: 1(0.533,0.516) 2(2.433,0.516)
  rect 1x1.2 smd: 3(1.499,2.898)
  silkscreen extent 0.03,0.49 2.95,2.77
SOT-23-6 [mm]
  rect 1.5x0.5 smd: 1(0,0)
  oval 1.5x0.5 smd: 2(0,-0.95) 3(0,-1.9) 4(3.212,-1.9) 5(3.212,-0.95) 6(3.212,0)
  silkscreen extent 1.1,-2.5 2.1,0.7
"USB TYPEC1" [mm]
  round 0.7 hole 0.7: 0(-7.215,-4.293) 0(-7.215,-4.193) 0(-7.215,-4.093) 0(-7.215,-3.993) 0(-7.215,-3.893) 0(-7.215,-3.793) 0(-7.215,-3.693) 0(-7.215,-3.693) 0(-7.215,-3.693) 0(-7.215,-3.693) 0(-7.215,-3.593) 0(-7.215,-3.493) 0(-7.215,-3.393) 0(-7.215,-3.293) 0(-7.215,-3.193) 0(-7.215,-3.093) 0(-7.215,-0.213) 0(-7.215,-0.113) 0(-7.215,-0.013) 0(-7.215,0.087) 0(-7.215,0.187) 0(-7.215,0.287) 0(-7.215,0.387) 0(-7.215,0.487) 0(-7.215,0.487) 0(-7.215,0.487) 0(-7.215,0.487) 0(-7.215,0.587) 0(-7.215,0.687) 0(-7.215,0.787) 0(-7.215,0.887) 0(-7.215,0.987) 0(-7.215,1.087) 0(-7.215,1.187) 0(1.435,-4.293) 0(1.435,-4.193) 0(1.435,-4.093) 0(1.435,-3.993) 0(1.435,-3.893) 0(1.435,-3.793) 0(1.435,-3.693) 0(1.435,-3.693) 0(1.435,-3.693) 0(1.435,-3.693) 0(1.435,-3.593) 0(1.435,-3.493) 0(1.435,-3.393) 0(1.435,-3.293) 0(1.435,-3.193) 0(1.435,-3.093) 0(1.435,-0.213) 0(1.435,-0.113) 0(1.435,-0.013) 0(1.435,0.087) 0(1.435,0.187) 0(1.435,0.287) 0(1.435,0.387) 0(1.435,0.487) 0(1.435,0.487) 0(1.435,0.487) 0(1.435,0.487) 0(1.435,0.587) 0(1.435,0.687) 0(1.435,0.787) 0(1.435,0.887) 0(1.435,0.987) 0(1.435,1.087) 0(1.435,1.187)
  oval 1x2.4 hole 0.7: 0(-7.215,-3.693) 0(-7.215,0.487) 0(1.435,-3.693) 0(1.435,0.487)
  round 0.6 hole 0.6: 20(-5.778,0) 20(0,0)
  rect 0.25x1.3 smd: A1(-6.19,1.397) A4(-5.39,1.397) A5(-4.14,1.397) A6(-3.14,1.397) A7(-2.64,1.397) A8(-1.64,1.397) A9(-0.39,1.397) A12(0.41,1.397) B1(0.16,1.397) B4(-0.64,1.397) B5(-1.14,1.397) B6(-2.14,1.397) B7(-3.64,1.397) B8(-4.64,1.397) B9(-5.14,1.397) B12(-5.94,1.397)
  silkscreen extent -6.44,-6.32 0.61,0.35

## Part data
B1 B2 B3 B4 B5 B6 B7 B8 B9 B10 B11 B12 B13 B14 B15 B16 B17 B18 B19 B20 B21 B22 B23 B24 B25 B26 B27 B28 B29 B30 B31 B32 B33 B34 B35 B36 B37 B38 B39 B40 B41 B42 B43 B44 B45 B46 B47 B48 B49 B50 B51 B52 B53 B54 B55 B56 B57 B58 B59 B59A B60 B61 B62 B63 B64 B65 B66 B67 B68 B69 B70 B71 B72 B73 B74 B75 B76 B77 B78 B79 B80 B81 B82 B83 B83A B84 B85 B86: library part BUTTON
C1 C2 C3 C4: library part "0805 100nF(104) 10% 50V", "贴片电容"
C5 C8: library part "0805 1uF (105) 10% 50V", "贴片电容"
C6 C7: library part "0805 22pF (220) 5% 50V", "贴片电容"
D1 D2 D3 D4 D5 D6 D7 D8 D9 D10 D11 D12 D13 D14 D15 D16 D17 D18 D19 D20 D21 D22 D23 D24 D25 D26 D27 D28 D29 D30 D31 D32 D33 D34 D35 D36 D37 D38 D39 D40 D41 D42 D43 D44 D45 D46 D47 D48 D49 D50 D51 D52 D53 D54 D55 D56 D57 D58 D59 D60 D61 D62 D63 D64 D65 D66 D67 D68 D69 D70 D71 D72 D73 D74 D75 D76 D77 D78 D79 D80 D81 D82 D83 D84 D85: "二极管"
DA1: "Transient Voltage Suppressor USB口静电防护"
Q1 Q2 Q3 Q4: "CJ2305 MOS"
R1 R2 R3 R4 R40 R95: library part "0805 10KΩ (1002) 1%", "贴片电阻"
R5 R6 R7: "Resistor for LED"
R8 R9 R10 R11 R12 R13 R14 R15 R16 R17 R18 R19 R20 R21 R22 R23 R24 R25 R26 R27 R28 R29 R30 R31 R32 R33 R34 R35 R36 R37 R38 R39 R41 R42 R43 R44 R45 R46 R47 R48 R49 R50 R51 R52 R53 R54 R55 R56 R57 R58 R59 R60 R61 R62 R63 R64 R65 R66 R67 R68 R69 R70 R71 R72 R73 R74 R75 R76 R77 R78 R79 R80 R81 R82 R83 R84 R85 R86 R87 R88 R89 R90 R91 R92 R96 R97: "灯阻"
R93 R94 RA1 RA2: library part "0805 22Ω (22R0) 1%", "贴片电阻"
S1: "Risym 4脚"
U1: "4-16ò????÷"

## Free pads (board coordinates)
  round 120 hole 120: 0(-9049.21,904.28) 3(-4549.21,904.28) 4(-11674.72,2194.29) 4(-1359.32,1640.8) 4(-1173.7,2394.29) 4(3225.79,2013.31) 4(3225.79,3515.28) 5(-10734.72,2194.29) 5(-2299.32,1640.8) 5(-2113.7,2394.29) 5(3225.79,1073.31) 5(3225.79,2575.28)
  round 157 hole 157: 1(-9049.21,1504.28) 3(-11674.72,1594.29) 3(-1359.32,2240.8) 3(-1173.7,2994.29) 3(2625.79,2013.31) 3(2625.79,3515.28) 4(-4549.21,1504.28) 6(-10734.72,1594.29) 6(-2299.32,2240.8) 6(-2113.7,2994.29) 6(-1079.21,3844.29) 6(2625.79,1073.31) 6(2625.79,2575.28)
  round 157 hole 157 unplated: 3(-2019.21,3844.29)
  round 120 hole 120 unplated: 4(-2019.21,4444.29) 5(-1079.21,4444.29)
  rect 196.85x157.48 smd far side: 4(232.28,4688.98)

## Via types
v1: diameter 23.62, hole 11.81, Top Layer to Bottom Layer, 150 vias
v2: diameter 27.56, hole 19.68, Top Layer to Bottom Layer, 63 vias
v3: diameter 39.37, hole 23.62, Top Layer to Bottom Layer, 12 vias
v4: diameter 24.41, hole 11.81, Top Layer to Bottom Layer, tented both sides, 10 vias
v5: diameter 23.62, hole 11.81, Top Layer to Bottom Layer, tented both sides, 3 vias
v6: diameter 31.5, hole 19.68, Top Layer to Bottom Layer, 2 vias

## Nets (pads, with @x,y where several pads share a name; then routed paths per layer and width w, separated by ;. In a path a pad name is that pad's centre, name@x,y a point inside that pad or via, vN(x,y) a via of type N, cw(c..) or ccw(c..) an arc to the next point about the centre after c; other vN are vias at no path point)
AL1: B86.3 R97.2 | length 840.1
  Bottom Layer w15.75: B86.3@-1235.53,4369.29 -1235.53,4288.08 ; B86.3@-1194.46,3969.29 -1194.46,4021.46 -1283,4110 -1283,4206 -1260,4229 ccw(c-1319.08,4288.08) -1235.53,4288.08 ; R97.2@-879.48,4288.08 R97.2@-868.4,4277 -1112.92,4277 -1124,4288.08 -1235.53,4288.08
AL2: B85.2 D85.1 | length 546.1
  Bottom Layer w10: D85.1@-2240,3995.28 -2150.98,3995.28 -2125,3969.29 B85.2@-2025.36,3969.29 -2068,4011.93 -2068,4261.93 B85.2@-2075.36,4269.29
AL3: B85.3 R96.2 | length 586.1
  Bottom Layer w10: B85.3@-1985.36,4369.29 -1985.36,4294.06 cw(c-2085.36,4294.06) -2014.65,4223.35 ccw(c-1951.04,4159.74) -2041,4159.74 -2041,4111 -1944.3,4014.3 B85.3@-1944.3,3969.29 -1944.3,3949.7 R96.2@-1865.36,3870.76
BACKLIGHT: IC1.30 Q1.1 R1.1 | length 640.6
  Bottom Layer w10: IC1.30@-7826.77,1190.95 -7775.78,1190.95 -7686.58,1101.75 R1.1@-7449.95,1101.75 -7449.95,1070.03 -7425.2,1045.28 -7316.93,1045.28 -7297.08,1065.12 Q1.1@-7297.08,1088.91
CAPSLOCK: IC1.12 Q2.1 R2.1 | length 9932.9
  Top Layer w10: v1(-8202.76,2238.19) -8198.82,2234.25 -7584.65,2234.25 -7504.09,2314.8 -2514.79,2314.8 -2294.1,2535.5 -2037.8,2535.5 -1962.96,2460.65 -1962.96,2443.35 -1888.48,2368.88 -1541.73,2368.88 -1490.95,2419.65 -1471.15,2419.65 -1329.6,2561.2 -797.2,2561.2 -623.21,2387.2 -621.46,2387.2 -515.75,2281.5 -378.48,2281.5 -314.28,2217.3 v1(99.21,2217.3)
  Bottom Layer w10: v1(-8202.76,2238.19) -8202.76,1866.5 -8346.46,1722.8 -8346.46,1570.87 -8246.06,1470.47 IC1.12@-8200.79,1470.47 ; v1(99.21,2217.3) R2.1@99.21,2424.3 ; R2.1@99.6,2424.69 Q2.1@99.6,2506.9
COL_: B6.1 B22.1 B38.1 B54.1 B70.1 U1.6 | length 7666.5
  Top Layer w10: v1(-6000,1602.36) -5964.41,1637.95 -4461.08,1637.95 -4407.77,1584.65 -4062.98,1584.65 ; -4393.7,1584.65 -4062.98,1584.65 ; B70.1@-2712.2,1069.29 -2714.45,1071.54 -2714.45,1193.18 -2712.2,1195.42 -2712.2,1461.61 -2835.24,1584.65 -4062.98,1584.65
  Bottom Layer w10: B6.1@-7074.21,4369.29 -7046.26,4341.34 -7046.26,4091.34 B6.1@-7024.21,4069.29 -7024.21,3944.21 B22.1@-6699.29,3619.29 -6671.34,3591.34 -6671.34,3341.34 B22.1@-6649.29,3319.29 -6649.29,3176.85 -6510.24,3037.8 B38.1@-6510.24,2869.29 -6482.28,2841.34 -6482.28,2591.34 B38.1@-6460.24,2569.29 -6137.1,2246.15 B54.1@-6137.1,2119.29 -6109.14,2091.34 -6109.14,1841.34 B54.1@-6087.1,1819.29 -6000,1732.2 U1.6@-6000,1389.76 ; B70.1@-2712.2,1069.29 -2571.26,1069.29 B70.1@-2570.87,1068.9
COL_1: B1.1 B17.1 B33.1 B49.1 B65.1 B81.1 U1.1 | length 10449.5
  Top Layer w10: B81.1@-11523.23,4069.29 B1.1@-10773.39,4069.29 ; B65.1@-11480.71,1369.29 -11402.36,1369.29 -10952.36,1819.29 B49.1@-9838.19,1819.29 ; v1(-9795.28,1515.75) -9718.5,1515.75 -9488.19,1285.43 -8204.72,1285.43 -7885.83,1604.33 -7629.91,1604.33 -7625.98,1604.33 -7610.24,1620.08 -7525.59,1620.08 v1(-7523.62,1618.11)
  Bottom Layer w10: B81.1@-11573.23,4369.29 -11545.28,4341.34 -11545.28,4091.34 B81.1@-11523.23,4069.29 ; B65.1@-11480.71,1369.29 -11452.76,1341.34 -11452.76,1091.34 B65.1@-11430.71,1069.29 ; B1.1@-10823.39,4369.29 -10795.44,4341.34 -10795.44,4091.34 B1.1@-10773.39,4069.29 -10773.39,3943.47 B17.1@-10449.21,3619.29 -10421.26,3591.34 -10421.26,3341.34 B17.1@-10399.21,3319.29 -10399.21,3216.14 -10262.2,3079.13 B33.1@-10262.2,2869.29 -10234.25,2841.34 -10234.25,2591.34 B33.1@-10212.2,2569.29 -10212.6,2568.9 -10212.6,2460.63 -9888.19,2136.22 B49.1@-9888.19,2119.29 -9860.24,2091.34 -9860.24,1841.34 B49.1@-9838.19,1819.29 -9838.19,1558.66 v1(-9795.28,1515.75) ; v1(-7523.62,1618.11) -7496.06,1590.55 -6322.83,1590.55 -6250,1517.72 U1.1@-6250,1389.76
COL_2: B2.1 B18.1 B34.1 B50.1 B66.1 B82.1 U1.2 | length 10814.3
  Top Layer w10: B82.1@-11386.22,3619.29 -11315.63,3689.88 -9769.82,3689.88 B18.1@-9699.23,3619.29 ; v1(-10326.77,1078.74) -10295.4,1047.36 -9830.83,1047.36 -9773.62,990.16 v1(-9318.9,990.16) ; v1(-8925.2,1344.49) -8889.76,1309.06 -8222.44,1309.06 -7902.48,1629.02 -7634.76,1629.02 -7620.08,1643.7 v1(-7501.97,1643.7)
  Bottom Layer w10: B82.1@-11386.22,3619.29 -11358.27,3591.34 -11358.27,3341.34 B82.1@-11336.22,3319.29 ; B66.1@-10586.22,1069.29 -10445.28,1069.29 B66.1@-10444.88,1068.9 -10336.61,1068.9 v1(-10326.77,1078.74) ; B2.1@-10073.56,4369.29 -10045.6,4341.34 -10045.6,4091.34 B2.1@-10023.56,4069.29 -10023.56,3954.66 -9824.79,3755.89 ; -9753.73,3684.84 -9699.23,3630.33 B18.1@-9699.23,3619.29 -9671.28,3591.34 -9671.28,3341.34 B18.1@-9649.23,3319.29 -9649.23,3218.13 -9511.81,3080.71 B34.1@-9511.81,2869.29 -9483.86,2841.34 -9483.86,2591.34 B34.1@-9461.81,2569.29 -9137.97,2245.45 B50.1@-9137.97,2119.29 -9110.02,2091.34 -9110.02,1841.34 B50.1@-9087.97,1819.29 -8925.2,1656.52 v1(-8925.2,1344.49) -8925.2,1263.78 -9198.82,990.16 v1(-9318.9,990.16) ; -9736.22,3667.32 -9824.79,3755.89 ; -9671.28,3551.18 -9671.28,3602.38 -9824.79,3755.89 ; v1(-7501.97,1643.7) -7466.69,1608.43 -6290.71,1608.43 -6200,1517.72 U1.2@-6200,1389.76
COL_3: B3.1 B19.1 B35.1 B51.1 B67.1 B83.1 B83A.1 U1.3 | length 11412.9
  Top Layer w10: B83.1@-11480.71,2869.29 B83A.1@-11291.73,2869.29 -11182.41,2978.61 -8870.74,2978.61 B35.1@-8761.42,2869.29 ; B83.1@-11430.71,2569.29 B83A.1@-11241.73,2569.29 ; B67.1@-9743.7,1069.29 -9507.91,1069.29 -9424.9,1152.3 v1(-8684.2,1152.3) ; v1(-8647.3,1387.8) -8392.52,1387.8 -8385.24,1395.08 ; B51.1@-8337.75,1819.29 -8337.75,1442.56 -8385.24,1395.08 ; v1(-7482.28,1675.2) -7613.86,1675.2 -7642.17,1646.89 -8138.54,1646.89 -8169.29,1616.14 -8169.29,1387.8 -8227.44,1329.65 -8373.35,1329.65 -8385.24,1341.54 -8385.24,1395.08
  Bottom Layer w10: B83A.1@-11291.73,2869.29 -11243.98,2821.54 B83A.1@-11243.98,2571.54 ; B67.1@-9793.7,1369.29 -9765.75,1341.34 -9765.75,1091.34 B67.1@-9743.7,1069.29 ; B3.1@-9323.72,4369.29 -9295.77,4341.34 -9295.77,4091.34 B3.1@-9273.72,4069.29 -9273.72,3943.77 B19.1@-8949.25,3619.29 -8921.29,3591.34 -8921.29,3341.34 B19.1@-8899.25,3319.29 -8899.25,3196.49 -8761.42,3058.66 B35.1@-8761.42,2869.29 -8733.46,2841.34 -8733.46,2591.34 B35.1@-8711.42,2569.29 -8388.86,2246.73 -8388.86,2120.4 B51.1@-8387.75,2119.29 -8359.8,2091.34 -8359.8,1841.34 B51.1@-8337.75,1819.29 ; v1(-8684.2,1152.3) -8684.2,1350.9 v1(-8647.3,1387.8) ; v1(-7482.28,1675.2) -7433.39,1626.3 -6258.58,1626.3 -6150,1517.72 U1.3@-6150,1389.76